# EAGLE board NU-Xtal-SnR (EAGLE 5.11)
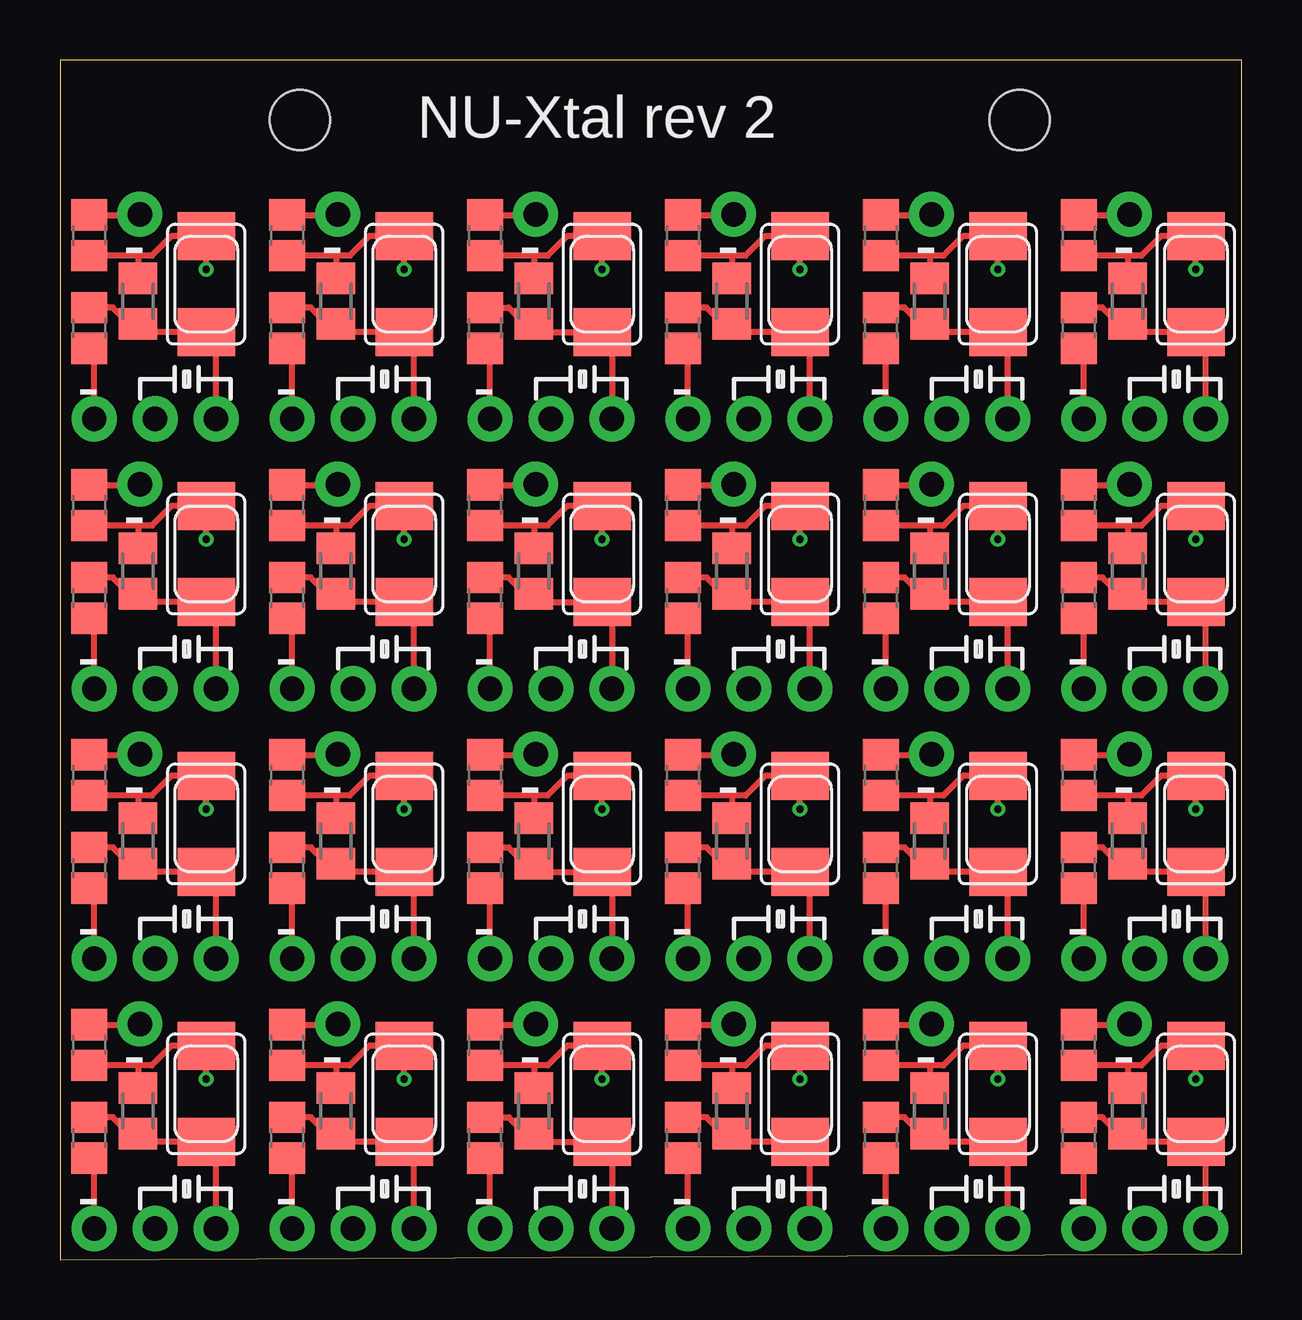
[diagram p0: board, top side]
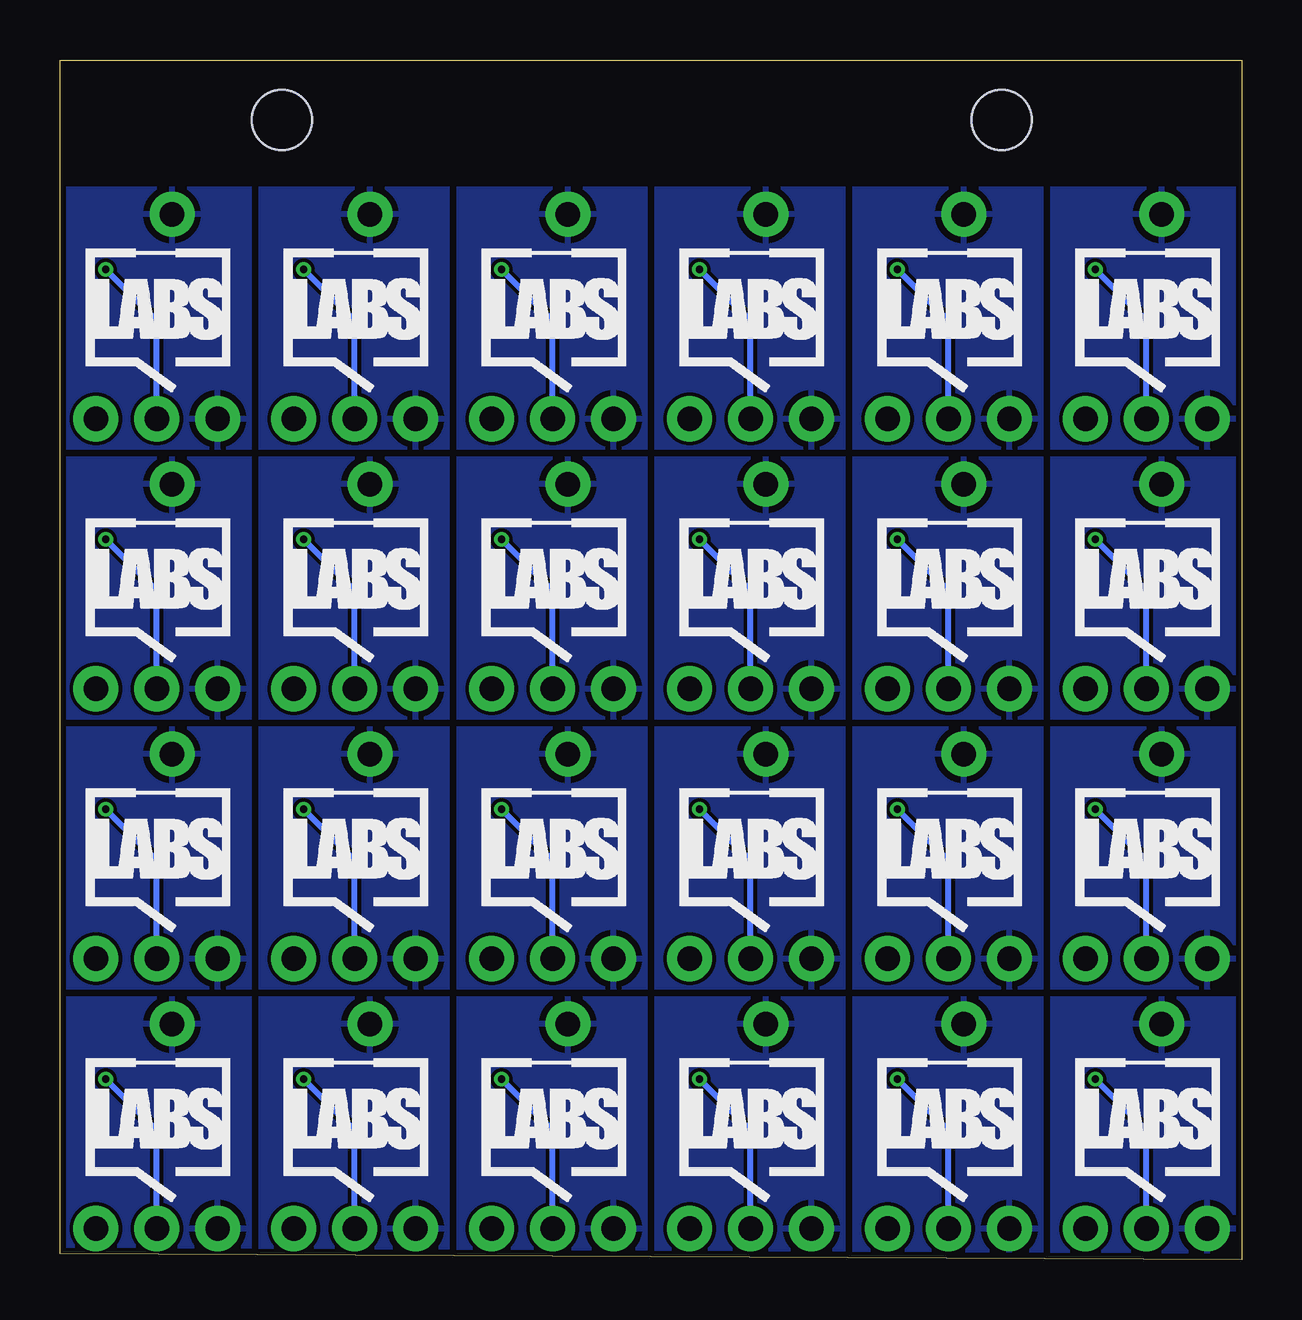
[diagram p1: board, bottom side, seen from below]

Size 49.25 x 50 mm. Coordinates in mm from the lower left corner, seen from the top.
Outline: 0,0 49.25,0.25 49.25,50 0,50 0,0
Copper layers (1*16): Top 0.035mm / dielectric 1.5mm / Bottom 0.035mm
Design rules "Fusion_eagle_rule_v1.1": minimum track width 6mil, minimum drill 12mil, track to track 6mil, track to pad 6mil, pad to pad 6mil, via to via 6mil, smd to smd 0mil, copper to edge 10mil, drill to drill 10mil, minimum pad ring 10mil, minimum via ring 6mil, stop-mask expansion 2mil, vias tented up to drill 100mil, thermal gap 10mil
Holes 2.5 mm at 10,47.5 40,47.5
tRestrict: area 8,45.5 to 12,49.5; area 38,45.5 to 42,49.5
bRestrict: area 0,11 to 49.2,11.2; area 8,0 to 8.2,11; area 16.2,0 to 16.5,11; area 24.5,0 to 24.8,11; area 32.8,0 to 33,11; area 41,0 to 41.2,11; area 0,22.2 to 49.2,22.5; area 8,11.2 to 8.2,22.2; area 16.2,11.2 to 16.5,22.2; area 24.5,11.2 to 24.8,22.2; area 32.8,11.2 to 33,22.2; area 41,11.2 to 41.2,22.2; 14 more areas

## Footprints (pad centres in the part's own frame; a part is rotated, then mirrored left to right if it is on the bottom)
C0805 = smd 1.3 x 1.5: 1 -0.85,0; 2 0.85,0
1X01NS = drill 1.016 pad 1.88 round: 1 0,0
1X03_NO_SILK = drill 1.016 pad 1.88 round: 1 0,0; 2 2.54,0; 3 5.08,0
M0805 = smd 1.3 x 1.6: 1 -0.95,0; 2 0.95,0
NX5032 = smd 2 x 2.4: P$1 2,0; P$2 -2,0

## Placement (x,y rotation side)
C1  [C0805]  1.22,5.08 270 top
C2  [C0805]  1.22,8.94 90 top
C3  [C0805]  9.47,5.08 270 top
C4  [C0805]  9.47,8.94 90 top
C5  [C0805]  17.72,5.08 270 top
C6  [C0805]  17.72,8.94 90 top
C7  [C0805]  25.97,5.08 270 top
C8  [C0805]  25.97,8.94 90 top
C9  [C0805]  34.22,5.08 270 top
C10  [C0805]  34.22,8.94 90 top
C11  [C0805]  42.47,5.08 270 top
C12  [C0805]  42.47,8.94 90 top
C13  [C0805]  1.22,16.33 270 top
C14  [C0805]  1.22,20.19 90 top
C15  [C0805]  9.47,16.33 270 top
C16  [C0805]  9.47,20.19 90 top
C17  [C0805]  17.72,16.33 270 top
C18  [C0805]  17.72,20.19 90 top
C19  [C0805]  25.97,16.33 270 top
C20  [C0805]  25.97,20.19 90 top
C21  [C0805]  34.22,16.33 270 top
C22  [C0805]  34.22,20.19 90 top
C23  [C0805]  42.47,16.33 270 top
C24  [C0805]  42.47,20.19 90 top
C25  [C0805]  1.22,27.58 270 top
C26  [C0805]  1.22,31.44 90 top
C27  [C0805]  9.47,27.58 270 top
C28  [C0805]  9.47,31.44 90 top
C29  [C0805]  17.72,27.58 270 top
C30  [C0805]  17.72,31.44 90 top
C31  [C0805]  25.97,27.58 270 top
C32  [C0805]  25.97,31.44 90 top
C33  [C0805]  34.22,27.58 270 top
C34  [C0805]  34.22,31.44 90 top
C35  [C0805]  42.47,27.58 270 top
C36  [C0805]  42.47,31.44 90 top
C37  [C0805]  1.22,38.83 270 top
C38  [C0805]  1.22,42.69 90 top
C39  [C0805]  9.47,38.83 270 top
C40  [C0805]  9.47,42.69 90 top
C41  [C0805]  17.72,38.83 270 top
C42  [C0805]  17.72,42.69 90 top
C43  [C0805]  25.97,38.83 270 top
C44  [C0805]  25.97,42.69 90 top
C45  [C0805]  34.22,38.83 270 top
C46  [C0805]  34.22,42.69 90 top
C47  [C0805]  42.47,38.83 270 top
C48  [C0805]  42.47,42.69 90 top
JP1  M01SMDNS  [1X01NS]  3.33,9.82 0 top
JP2  M01SMDNS  [1X01NS]  11.58,9.82 0 top
JP3  [1X03_NO_SILK]  1.42,1.29 0 top
JP4  [1X03_NO_SILK]  9.67,1.29 0 top
JP5  M01SMDNS  [1X01NS]  19.83,9.82 0 top
JP6  [1X03_NO_SILK]  17.92,1.29 0 top
JP7  M01SMDNS  [1X01NS]  28.08,9.82 0 top
JP8  [1X03_NO_SILK]  26.17,1.29 0 top
JP9  M01SMDNS  [1X01NS]  36.33,9.82 0 top
JP10  [1X03_NO_SILK]  34.42,1.29 0 top
JP11  M01SMDNS  [1X01NS]  44.58,9.82 0 top
JP12  [1X03_NO_SILK]  42.67,1.29 0 top
JP13  M01SMDNS  [1X01NS]  3.33,21.07 0 top
JP14  [1X03_NO_SILK]  1.42,12.54 0 top
JP15  M01SMDNS  [1X01NS]  11.58,21.07 0 top
JP16  [1X03_NO_SILK]  9.67,12.54 0 top
JP17  M01SMDNS  [1X01NS]  19.83,21.07 0 top
JP18  [1X03_NO_SILK]  17.92,12.54 0 top
JP19  M01SMDNS  [1X01NS]  28.08,21.07 0 top
JP20  [1X03_NO_SILK]  26.17,12.54 0 top
JP21  M01SMDNS  [1X01NS]  36.33,21.07 0 top
JP22  [1X03_NO_SILK]  34.42,12.54 0 top
JP23  M01SMDNS  [1X01NS]  44.58,21.07 0 top
JP24  [1X03_NO_SILK]  42.67,12.54 0 top
JP25  M01SMDNS  [1X01NS]  3.33,32.32 0 top
JP26  [1X03_NO_SILK]  1.42,23.79 0 top
JP27  M01SMDNS  [1X01NS]  11.58,32.32 0 top
JP28  [1X03_NO_SILK]  9.67,23.79 0 top
JP29  M01SMDNS  [1X01NS]  19.83,32.32 0 top
JP30  [1X03_NO_SILK]  17.92,23.79 0 top
JP31  M01SMDNS  [1X01NS]  28.08,32.32 0 top
JP32  [1X03_NO_SILK]  26.17,23.79 0 top
JP33  M01SMDNS  [1X01NS]  36.33,32.32 0 top
JP34  [1X03_NO_SILK]  34.42,23.79 0 top
JP35  M01SMDNS  [1X01NS]  44.58,32.32 0 top
JP36  [1X03_NO_SILK]  42.67,23.79 0 top
JP37  M01SMDNS  [1X01NS]  3.33,43.57 0 top
JP38  [1X03_NO_SILK]  1.42,35.04 0 top
JP39  M01SMDNS  [1X01NS]  11.58,43.57 0 top
JP40  [1X03_NO_SILK]  9.67,35.04 0 top
JP41  M01SMDNS  [1X01NS]  19.83,43.57 0 top
JP42  [1X03_NO_SILK]  17.92,35.04 0 top
JP43  M01SMDNS  [1X01NS]  28.08,43.57 0 top
JP44  [1X03_NO_SILK]  26.17,35.04 0 top
JP45  M01SMDNS  [1X01NS]  36.33,43.57 0 top
JP46  [1X03_NO_SILK]  34.42,35.04 0 top
JP47  M01SMDNS  [1X01NS]  44.58,43.57 0 top
JP48  [1X03_NO_SILK]  42.67,35.04 0 top
R1  [M0805]  3.25,6.2 270 top
R2  [M0805]  11.5,6.2 270 top
R3  [M0805]  19.75,6.2 270 top
R4  [M0805]  28,6.2 270 top
R5  [M0805]  36.25,6.2 270 top
R6  [M0805]  44.5,6.2 270 top
R7  [M0805]  3.25,17.45 270 top
R8  [M0805]  11.5,17.45 270 top
R9  [M0805]  19.75,17.45 270 top
R10  [M0805]  28,17.45 270 top
R11  [M0805]  36.25,17.45 270 top
R12  [M0805]  44.5,17.45 270 top
R13  [M0805]  3.25,28.7 270 top
R14  [M0805]  11.5,28.7 270 top
R15  [M0805]  19.75,28.7 270 top
R16  [M0805]  28,28.7 270 top
R17  [M0805]  36.25,28.7 270 top
R18  [M0805]  44.5,28.7 270 top
R19  [M0805]  3.25,39.95 270 top
R20  [M0805]  11.5,39.95 270 top
R21  [M0805]  19.75,39.95 270 top
R22  [M0805]  28,39.95 270 top
R23  [M0805]  36.25,39.95 270 top
R24  [M0805]  44.5,39.95 270 top
U$1  [SRL-LOGO-BSILK-5MM]  6.91,3.66 0 top
U$2  [SRL-LOGO-BSILK-5MM]  15.16,3.66 0 top
U$3  [SRL-LOGO-BSILK-5MM]  23.41,3.66 0 top
U$4  [SRL-LOGO-BSILK-5MM]  31.66,3.66 0 top
U$5  [SRL-LOGO-BSILK-5MM]  39.91,3.66 0 top
U$6  [SRL-LOGO-BSILK-5MM]  48.16,3.66 0 top
U$7  [SRL-LOGO-BSILK-5MM]  6.91,14.91 0 top
U$8  [SRL-LOGO-BSILK-5MM]  15.16,14.91 0 top
U$9  [SRL-LOGO-BSILK-5MM]  23.41,14.91 0 top
U$10  [SRL-LOGO-BSILK-5MM]  31.66,14.91 0 top
U$11  [SRL-LOGO-BSILK-5MM]  39.91,14.91 0 top
U$12  [SRL-LOGO-BSILK-5MM]  48.16,14.91 0 top
U$13  [SRL-LOGO-BSILK-5MM]  6.91,26.16 0 top
U$14  [SRL-LOGO-BSILK-5MM]  15.16,26.16 0 top
U$15  [SRL-LOGO-BSILK-5MM]  23.41,26.16 0 top
U$16  [SRL-LOGO-BSILK-5MM]  31.66,26.16 0 top
U$17  [SRL-LOGO-BSILK-5MM]  39.91,26.16 0 top
U$18  [SRL-LOGO-BSILK-5MM]  48.16,26.16 0 top
U$19  [SRL-LOGO-BSILK-5MM]  6.91,37.41 0 top
U$20  [SRL-LOGO-BSILK-5MM]  15.16,37.41 0 top
U$21  [SRL-LOGO-BSILK-5MM]  23.41,37.41 0 top
U$22  [SRL-LOGO-BSILK-5MM]  31.66,37.41 0 top
U$23  [SRL-LOGO-BSILK-5MM]  39.91,37.41 0 top
U$24  [SRL-LOGO-BSILK-5MM]  48.16,37.41 0 top
X1  [NX5032]  14.35,6.91 90 top
X2  [NX5032]  6.1,6.91 90 top
X3  [NX5032]  22.6,6.91 90 top
X4  [NX5032]  30.85,6.91 90 top
X5  [NX5032]  39.1,6.91 90 top
X6  [NX5032]  47.35,6.91 90 top
X7  [NX5032]  6.1,18.16 90 top
X8  [NX5032]  14.35,18.16 90 top
X9  [NX5032]  22.6,18.16 90 top
X10  [NX5032]  30.85,18.16 90 top
X11  [NX5032]  39.1,18.16 90 top
X12  [NX5032]  47.35,18.16 90 top
X13  [NX5032]  6.1,29.41 90 top
X14  [NX5032]  14.35,29.41 90 top
X15  [NX5032]  22.6,29.41 90 top
X16  [NX5032]  30.85,29.41 90 top
X17  [NX5032]  39.1,29.41 90 top
X18  [NX5032]  47.35,29.41 90 top
X19  [NX5032]  6.1,40.66 90 top
X20  [NX5032]  14.35,40.66 90 top
X21  [NX5032]  22.6,40.66 90 top
X22  [NX5032]  30.85,40.66 90 top
X23  [NX5032]  39.1,40.66 90 top
X24  [NX5032]  47.35,40.66 90 top

## Library data of the parts
C1-C48 R1-R24 = resistor
JP1-JP48 = SparkFun
U$1-U$24 = SmallRoomLabs
X1-X24 = adafruit

## Nets
GND: C1.2 C2.2 JP1.1 JP3.1
GND1: C3.2 C4.2 JP2.1 JP4.1
GND2: C5.2 C6.2 JP5.1 JP6.1
GND3: C7.2 C8.2 JP7.1 JP8.1
GND4: C9.2 C10.2 JP9.1 JP10.1
GND5: C11.2 C12.2 JP11.1 JP12.1
GND6: C13.2 C14.2 JP13.1 JP14.1
GND7: C15.2 C16.2 JP15.1 JP16.1
GND8: C17.2 C18.2 JP17.1 JP18.1
GND9: C19.2 C20.2 JP19.1 JP20.1
GND10: C21.2 C22.2 JP21.1 JP22.1
GND11: C23.2 C24.2 JP23.1 JP24.1
GND12: C25.2 C26.2 JP25.1 JP26.1
GND13: C27.2 C28.2 JP27.1 JP28.1
GND14: C29.2 C30.2 JP29.1 JP30.1
GND15: C31.2 C32.2 JP31.1 JP32.1
GND16: C33.2 C34.2 JP33.1 JP34.1
GND17: C35.2 C36.2 JP35.1 JP36.1
GND18: C37.2 C38.2 JP37.1 JP38.1
GND19: C39.2 C40.2 JP39.1 JP40.1
GND20: C41.2 C42.2 JP41.1 JP42.1
GND21: C43.2 C44.2 JP43.1 JP44.1
GND22: C45.2 C46.2 JP45.1 JP46.1
GND23: C47.2 C48.2 JP47.1 JP48.1
N$1: C3.1 JP4.3 R2.2 X1.P$2
N$2: C4.1 JP4.2 R2.1 X1.P$1
N$3: C1.1 JP3.3 R1.2 X2.P$2
N$4: C2.1 JP3.2 R1.1 X2.P$1
N$5: C5.1 JP6.3 R3.2 X3.P$2
N$6: C6.1 JP6.2 R3.1 X3.P$1
N$7: C7.1 JP8.3 R4.2 X4.P$2
N$8: C8.1 JP8.2 R4.1 X4.P$1
N$9: C9.1 JP10.3 R5.2 X5.P$2
N$10: C10.1 JP10.2 R5.1 X5.P$1
N$11: C11.1 JP12.3 R6.2 X6.P$2
N$12: C12.1 JP12.2 R6.1 X6.P$1
N$13: C13.1 JP14.3 R7.2 X7.P$2
N$14: C14.1 JP14.2 R7.1 X7.P$1
N$15: C15.1 JP16.3 R8.2 X8.P$2
N$16: C16.1 JP16.2 R8.1 X8.P$1
N$17: C17.1 JP18.3 R9.2 X9.P$2
N$18: C18.1 JP18.2 R9.1 X9.P$1
N$19: C19.1 JP20.3 R10.2 X10.P$2
N$20: C20.1 JP20.2 R10.1 X10.P$1
N$21: C21.1 JP22.3 R11.2 X11.P$2
N$22: C22.1 JP22.2 R11.1 X11.P$1
N$23: C23.1 JP24.3 R12.2 X12.P$2
N$24: C24.1 JP24.2 R12.1 X12.P$1
N$25: C25.1 JP26.3 R13.2 X13.P$2
N$26: C26.1 JP26.2 R13.1 X13.P$1
N$27: C27.1 JP28.3 R14.2 X14.P$2
N$28: C28.1 JP28.2 R14.1 X14.P$1
N$29: C29.1 JP30.3 R15.2 X15.P$2
N$30: C30.1 JP30.2 R15.1 X15.P$1
N$31: C31.1 JP32.3 R16.2 X16.P$2
N$32: C32.1 JP32.2 R16.1 X16.P$1
N$33: C33.1 JP34.3 R17.2 X17.P$2
N$34: C34.1 JP34.2 R17.1 X17.P$1
N$35: C35.1 JP36.3 R18.2 X18.P$2
N$36: C36.1 JP36.2 R18.1 X18.P$1
N$37: C37.1 JP38.3 R19.2 X19.P$2
N$38: C38.1 JP38.2 R19.1 X19.P$1
N$39: C39.1 JP40.3 R20.2 X20.P$2
N$40: C40.1 JP40.2 R20.1 X20.P$1
N$41: C41.1 JP42.3 R21.2 X21.P$2
N$42: C42.1 JP42.2 R21.1 X21.P$1
N$43: C43.1 JP44.3 R22.2 X22.P$2
N$44: C44.1 JP44.2 R22.1 X22.P$1
N$45: C45.1 JP46.3 R23.2 X23.P$2
N$46: C46.1 JP46.2 R23.1 X23.P$1
N$47: C47.1 JP48.3 R24.2 X24.P$2
N$48: C48.1 JP48.2 R24.1 X24.P$1

## Tracks (layer width: path | path; a pad name or v marks a point on that pad's centre or on a via)
GND
  Top 0.254: C2.2 3.3,9.79 JP1.1 | JP3.1 1.43,4.02 C1.2
  pour Bottom: 0,0 8,0 8,11 0,11
GND1
  Top 0.254: C4.2 11.55,9.79 JP2.1 | JP4.1 9.68,4.02 C3.2
  pour Bottom: 8.25,0 16.25,0 16.25,11 8.25,11
GND2
  Top 0.254: C6.2 19.8,9.79 JP5.1 | JP6.1 17.93,4.02 C5.2
  pour Bottom: 16.5,0 24.5,0 24.5,11 16.5,11
GND3
  Top 0.254: C8.2 28.05,9.79 JP7.1 | JP8.1 26.18,4.02 C7.2
  pour Bottom: 24.75,0 32.75,0 32.75,11 24.75,11
GND4
  Top 0.254: C10.2 36.3,9.79 JP9.1 | JP10.1 34.42,4.02 C9.2
  pour Bottom: 33,0 41,0 41,11 33,11
GND5
  Top 0.254: C12.2 44.55,9.79 JP11.1 | JP12.1 42.67,4.02 C11.2
  pour Bottom: 41.25,0 49.25,0 49.25,11 41.25,11
GND6
  Top 0.254: C14.2 3.3,21.04 JP13.1 | JP14.1 1.43,15.27 C13.2
  pour Bottom: 0,11.25 8,11.25 8,22.25 0,22.25
GND7
  Top 0.254: C16.2 11.55,21.04 JP15.1 | JP16.1 9.68,15.27 C15.2
  pour Bottom: 8.25,11.25 16.25,11.25 16.25,22.25 8.25,22.25
GND8
  Top 0.254: C18.2 19.8,21.04 JP17.1 | JP18.1 17.93,15.27 C17.2
  pour Bottom: 16.5,11.25 24.5,11.25 24.5,22.25 16.5,22.25
GND9
  Top 0.254: C20.2 28.05,21.04 JP19.1 | JP20.1 26.18,15.27 C19.2
  pour Bottom: 24.75,11.25 32.75,11.25 32.75,22.25 24.75,22.25
GND10
  Top 0.254: C22.2 36.3,21.04 JP21.1 | JP22.1 34.42,15.27 C21.2
  pour Bottom: 33,11.25 41,11.25 41,22.25 33,22.25
GND11
  Top 0.254: C24.2 44.55,21.04 JP23.1 | JP24.1 42.67,15.27 C23.2
  pour Bottom: 41.25,11.25 49.25,11.25 49.25,22.25 41.25,22.25
GND12
  Top 0.254: C26.2 3.3,32.29 JP25.1 | JP26.1 1.43,26.52 C25.2
  pour Bottom: 0,22.5 8,22.5 8,33.5 0,33.5
GND13
  Top 0.254: C28.2 11.55,32.29 JP27.1 | JP28.1 9.68,26.52 C27.2
  pour Bottom: 8.25,22.5 16.25,22.5 16.25,33.5 8.25,33.5
GND14
  Top 0.254: C30.2 19.8,32.29 JP29.1 | JP30.1 17.93,26.52 C29.2
  pour Bottom: 16.5,22.5 24.5,22.5 24.5,33.5 16.5,33.5
GND15
  Top 0.254: C32.2 28.05,32.29 JP31.1 | JP32.1 26.18,26.52 C31.2
  pour Bottom: 24.75,22.5 32.75,22.5 32.75,33.5 24.75,33.5
GND16
  Top 0.254: C34.2 36.3,32.29 JP33.1 | JP34.1 34.42,26.52 C33.2
  pour Bottom: 33,22.5 41,22.5 41,33.5 33,33.5
GND17
  Top 0.254: C36.2 44.55,32.29 JP35.1 | JP36.1 42.67,26.52 C35.2
  pour Bottom: 41.25,22.5 49.25,22.5 49.25,33.5 41.25,33.5
GND18
  Top 0.254: C38.2 3.3,43.54 JP37.1 | JP38.1 1.43,37.77 C37.2
  pour Bottom: 0,33.75 8,33.75 8,44.75 0,44.75
GND19
  Top 0.254: C40.2 11.55,43.54 JP39.1 | JP40.1 9.68,37.77 C39.2
  pour Bottom: 8.25,33.75 16.25,33.75 16.25,44.75 8.25,44.75
GND20
  Top 0.254: C42.2 19.8,43.54 JP41.1 | JP42.1 17.93,37.77 C41.2
  pour Bottom: 16.5,33.75 24.5,33.75 24.5,44.75 16.5,44.75
GND21
  Top 0.254: C44.2 28.05,43.54 JP43.1 | JP44.1 26.18,37.77 C43.2
  pour Bottom: 24.75,33.75 32.75,33.75 32.75,44.75 24.75,44.75
GND22
  Top 0.254: C46.2 36.3,43.54 JP45.1 | JP46.1 34.42,37.77 C45.2
  pour Bottom: 33,33.75 41,33.75 41,44.75 33,44.75
GND23
  Top 0.254: C48.2 44.55,43.54 JP47.1 | JP48.1 42.67,37.77 C47.2
  pour Bottom: 41.25,33.75 49.25,33.75 49.25,44.75 41.25,44.75
N$1
  Top 0.254: JP4.3 14.76,4.5 X1.P$2 11.84,4.91 R2.2 11.26,5.49 10.89,5.49 10.45,5.93 C3.1
N$2  (via drill 0.3)
  Top 0.254: v14.35,7.52 X1.P$1 12.89,8.91 12.07,8.09 11.5,8.09 | 11.5,8.09 C4.1 | 11.5,8.09 R2.1
  Bottom 0.254: JP4.2 12.21,5.39 v14.35,7.52
N$3
  Top 0.254: JP3.3 6.5,4.5 X2.P$2 3.59,4.91 R1.2 3.01,5.49 2.64,5.49 2.2,5.93 C1.1
N$4  (via drill 0.3)
  Top 0.254: v6.1,7.52 X2.P$1 4.64,8.91 3.82,8.09 3.25,8.09 | 3.25,8.09 C2.1 | 3.25,8.09 R1.1
  Bottom 0.254: JP3.2 3.96,5.39 v6.1,7.52
N$5
  Top 0.254: JP6.3 23,4.5 X3.P$2 20.09,4.91 R3.2 19.51,5.49 19.14,5.49 18.7,5.93 C5.1
N$6  (via drill 0.3)
  Top 0.254: v22.6,7.52 X3.P$1 21.14,8.91 20.32,8.09 19.75,8.09 | 19.75,8.09 C6.1 | 19.75,8.09 R3.1
  Bottom 0.254: JP6.2 20.46,5.39 v22.6,7.52
N$7
  Top 0.254: JP8.3 31.25,4.5 X4.P$2 28.34,4.91 R4.2 27.76,5.49 27.39,5.49 26.95,5.93 C7.1
N$8  (via drill 0.3)
  Top 0.254: v30.85,7.52 X4.P$1 29.39,8.91 28.57,8.09 28,8.09 | 28,8.09 C8.1 | 28,8.09 R4.1
  Bottom 0.254: JP8.2 28.71,5.39 v30.85,7.52
N$9
  Top 0.254: JP10.3 39.51,4.5 X5.P$2 36.59,4.91 R5.2 36.01,5.49 35.64,5.49 35.2,5.93 C9.1
N$10  (via drill 0.3)
  Top 0.254: v39.1,7.52 X5.P$1 37.64,8.91 36.82,8.09 36.25,8.09 | 36.25,8.09 C10.1 | 36.25,8.09 R5.1
  Bottom 0.254: JP10.2 36.97,5.39 v39.1,7.52
N$11
  Top 0.254: JP12.3 47.76,4.5 X6.P$2 44.84,4.91 R6.2 44.26,5.49 43.89,5.49 43.45,5.93 C11.1
N$12  (via drill 0.3)
  Top 0.254: v47.35,7.52 X6.P$1 45.89,8.91 45.07,8.09 44.5,8.09 | 44.5,8.09 C12.1 | 44.5,8.09 R6.1
  Bottom 0.254: JP12.2 45.22,5.39 v47.35,7.52
N$13
  Top 0.254: JP14.3 6.5,15.75 X7.P$2 3.59,16.16 R7.2 3.01,16.74 2.64,16.74 2.2,17.18 C13.1
N$14  (via drill 0.3)
  Top 0.254: v6.1,18.77 X7.P$1 4.64,20.16 3.82,19.34 3.25,19.34 | 3.25,19.34 C14.1 | 3.25,19.34 R7.1
  Bottom 0.254: JP14.2 3.96,16.64 v6.1,18.77
N$15
  Top 0.254: JP16.3 14.76,15.75 X8.P$2 11.84,16.16 R8.2 11.26,16.74 10.89,16.74 10.45,17.18 C15.1
N$16  (via drill 0.3)
  Top 0.254: v14.35,18.77 X8.P$1 12.89,20.16 12.07,19.34 11.5,19.34 | 11.5,19.34 C16.1 | 11.5,19.34 R8.1
  Bottom 0.254: JP16.2 12.21,16.64 v14.35,18.77
N$17
  Top 0.254: JP18.3 23,15.75 X9.P$2 20.09,16.16 R9.2 19.51,16.74 19.14,16.74 18.7,17.18 C17.1
N$18  (via drill 0.3)
  Top 0.254: v22.6,18.77 X9.P$1 21.14,20.16 20.32,19.34 19.75,19.34 | 19.75,19.34 C18.1 | 19.75,19.34 R9.1
  Bottom 0.254: JP18.2 20.46,16.64 v22.6,18.77
N$19
  Top 0.254: JP20.3 31.25,15.75 X10.P$2 28.34,16.16 R10.2 27.76,16.74 27.39,16.74 26.95,17.18 C19.1
N$20  (via drill 0.3)
  Top 0.254: v30.85,18.77 X10.P$1 29.39,20.16 28.57,19.34 28,19.34 | 28,19.34 C20.1 | 28,19.34 R10.1
  Bottom 0.254: JP20.2 28.71,16.64 v30.85,18.77
N$21
  Top 0.254: JP22.3 39.51,15.75 X11.P$2 36.59,16.16 R11.2 36.01,16.74 35.64,16.74 35.2,17.18 C21.1
N$22  (via drill 0.3)
  Top 0.254: v39.1,18.77 X11.P$1 37.64,20.16 36.82,19.34 36.25,19.34 | 36.25,19.34 C22.1 | 36.25,19.34 R11.1
  Bottom 0.254: JP22.2 36.97,16.64 v39.1,18.77
N$23
  Top 0.254: JP24.3 47.76,15.75 X12.P$2 44.84,16.16 R12.2 44.26,16.74 43.89,16.74 43.45,17.18 C23.1
N$24  (via drill 0.3)
  Top 0.254: v47.35,18.77 X12.P$1 45.89,20.16 45.07,19.34 44.5,19.34 | 44.5,19.34 C24.1 | 44.5,19.34 R12.1
  Bottom 0.254: JP24.2 45.22,16.64 v47.35,18.77
N$25
  Top 0.254: JP26.3 6.5,27 X13.P$2 3.59,27.41 R13.2 3.01,27.99 2.64,27.99 2.2,28.43 C25.1
N$26  (via drill 0.3)
  Top 0.254: v6.1,30.02 X13.P$1 4.64,31.41 3.82,30.59 3.25,30.59 | 3.25,30.59 C26.1 | 3.25,30.59 R13.1
  Bottom 0.254: JP26.2 3.96,27.89 v6.1,30.02
N$27
  Top 0.254: JP28.3 14.76,27 X14.P$2 11.84,27.41 R14.2 11.26,27.99 10.89,27.99 10.45,28.43 C27.1
N$28  (via drill 0.3)
  Top 0.254: v14.35,30.02 X14.P$1 12.89,31.41 12.07,30.59 11.5,30.59 | 11.5,30.59 C28.1 | 11.5,30.59 R14.1
  Bottom 0.254: JP28.2 12.21,27.89 v14.35,30.02
N$29
  Top 0.254: JP30.3 23,27 X15.P$2 20.09,27.41 R15.2 19.51,27.99 19.14,27.99 18.7,28.43 C29.1
N$30  (via drill 0.3)
  Top 0.254: v22.6,30.02 X15.P$1 21.14,31.41 20.32,30.59 19.75,30.59 | 19.75,30.59 C30.1 | 19.75,30.59 R15.1
  Bottom 0.254: JP30.2 20.46,27.89 v22.6,30.02
N$31
  Top 0.254: JP32.3 31.25,27 X16.P$2 28.34,27.41 R16.2 27.76,27.99 27.39,27.99 26.95,28.43 C31.1
N$32  (via drill 0.3)
  Top 0.254: v30.85,30.02 X16.P$1 29.39,31.41 28.57,30.59 28,30.59 | 28,30.59 C32.1 | 28,30.59 R16.1
  Bottom 0.254: JP32.2 28.71,27.89 v30.85,30.02
N$33
  Top 0.254: JP34.3 39.51,27 X17.P$2 36.59,27.41 R17.2 36.01,27.99 35.64,27.99 35.2,28.43 C33.1
N$34  (via drill 0.3)
  Top 0.254: v39.1,30.02 X17.P$1 37.64,31.41 36.82,30.59 36.25,30.59 | 36.25,30.59 C34.1 | 36.25,30.59 R17.1
  Bottom 0.254: JP34.2 36.97,27.89 v39.1,30.02
N$35
  Top 0.254: JP36.3 47.76,27 X18.P$2 44.84,27.41 R18.2 44.26,27.99 43.89,27.99 43.45,28.43 C35.1
N$36  (via drill 0.3)
  Top 0.254: v47.35,30.02 X18.P$1 45.89,31.41 45.07,30.59 44.5,30.59 | 44.5,30.59 C36.1 | 44.5,30.59 R18.1
  Bottom 0.254: JP36.2 45.22,27.89 v47.35,30.02
N$37
  Top 0.254: JP38.3 6.5,38.25 X19.P$2 3.59,38.66 R19.2 3.01,39.24 2.64,39.24 2.2,39.68 C37.1
N$38  (via drill 0.3)
  Top 0.254: v6.1,41.27 X19.P$1 4.64,42.66 3.82,41.84 3.25,41.84 | 3.25,41.84 C38.1 | 3.25,41.84 R19.1
  Bottom 0.254: JP38.2 3.96,39.14 v6.1,41.27
N$39
  Top 0.254: JP40.3 14.76,38.25 X20.P$2 11.84,38.66 R20.2 11.26,39.24 10.89,39.24 10.45,39.68 C39.1
N$40  (via drill 0.3)
  Top 0.254: v14.35,41.27 X20.P$1 12.89,42.66 12.07,41.84 11.5,41.84 | 11.5,41.84 C40.1 | 11.5,41.84 R20.1
  Bottom 0.254: JP40.2 12.21,39.14 v14.35,41.27
N$41
  Top 0.254: JP42.3 23,38.25 X21.P$2 20.09,38.66 R21.2 19.51,39.24 19.14,39.24 18.7,39.68 C41.1
N$42  (via drill 0.3)
  Top 0.254: v22.6,41.27 X21.P$1 21.14,42.66 20.32,41.84 19.75,41.84 | 19.75,41.84 C42.1 | 19.75,41.84 R21.1
  Bottom 0.254: JP42.2 20.46,39.14 v22.6,41.27
N$43
  Top 0.254: JP44.3 31.25,38.25 X22.P$2 28.34,38.66 R22.2 27.76,39.24 27.39,39.24 26.95,39.68 C43.1
N$44  (via drill 0.3)
  Top 0.254: v30.85,41.27 X22.P$1 29.39,42.66 28.57,41.84 28,41.84 | 28,41.84 C44.1 | 28,41.84 R22.1
  Bottom 0.254: JP44.2 28.71,39.14 v30.85,41.27
N$45
  Top 0.254: JP46.3 39.51,38.25 X23.P$2 36.59,38.66 R23.2 36.01,39.24 35.64,39.24 35.2,39.68 C45.1
N$46  (via drill 0.3)
  Top 0.254: v39.1,41.27 X23.P$1 37.64,42.66 36.82,41.84 36.25,41.84 | 36.25,41.84 C46.1 | 36.25,41.84 R23.1
  Bottom 0.254: JP46.2 36.97,39.14 v39.1,41.27
N$47
  Top 0.254: JP48.3 47.76,38.25 X24.P$2 44.84,38.66 R24.2 44.26,39.24 43.89,39.24 43.45,39.68 C47.1
N$48  (via drill 0.3)
  Top 0.254: v47.35,41.27 X24.P$1 45.89,42.66 45.07,41.84 44.5,41.84 | 44.5,41.84 C48.1 | 44.5,41.84 R24.1
  Bottom 0.254: JP48.2 45.22,39.14 v47.35,41.27

## Text on the board
tPlace: NU-Xtal rev 2 | - | - | - | - | - | - | - | - | - | - | - | - | - | - | - | - | - | - | - | - | - | - | - | - | - | - | - | - | - | - | - | - | - | - | - | - | - | - | - | - | - | - | - | - | - | - | - | -